# Altium PCB rotenc.PcbDoc
Units mil, origin at the board's own origin, x right, y up, seen from the top; angles counter-clockwise.
Board outline 1404 x 1404 mil, 2 copper layers (Top Layer, Bottom Layer); 22 components, 18 nets, 74 pads, 20 vias.
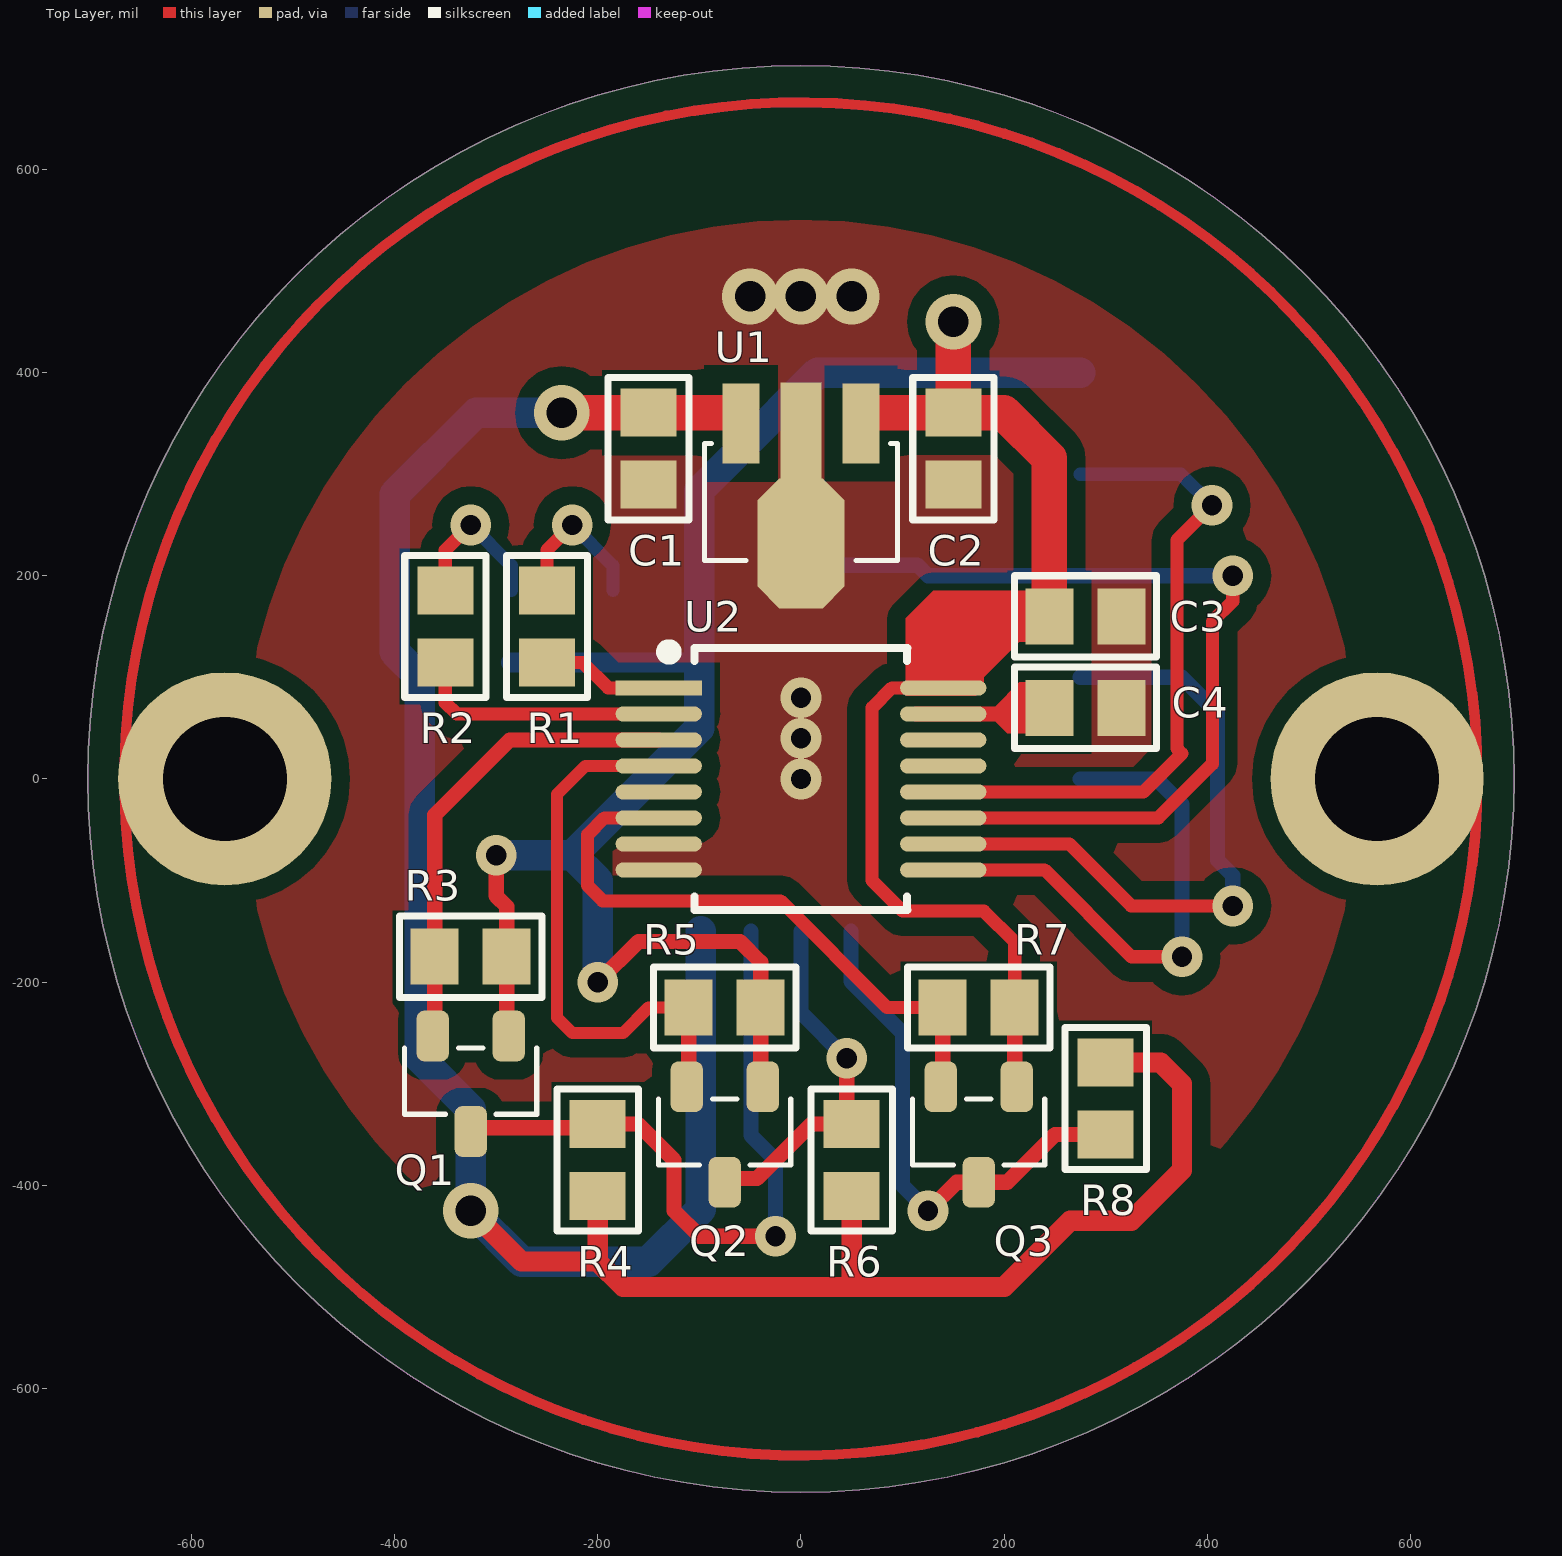
[diagram p0: Top Layer view]
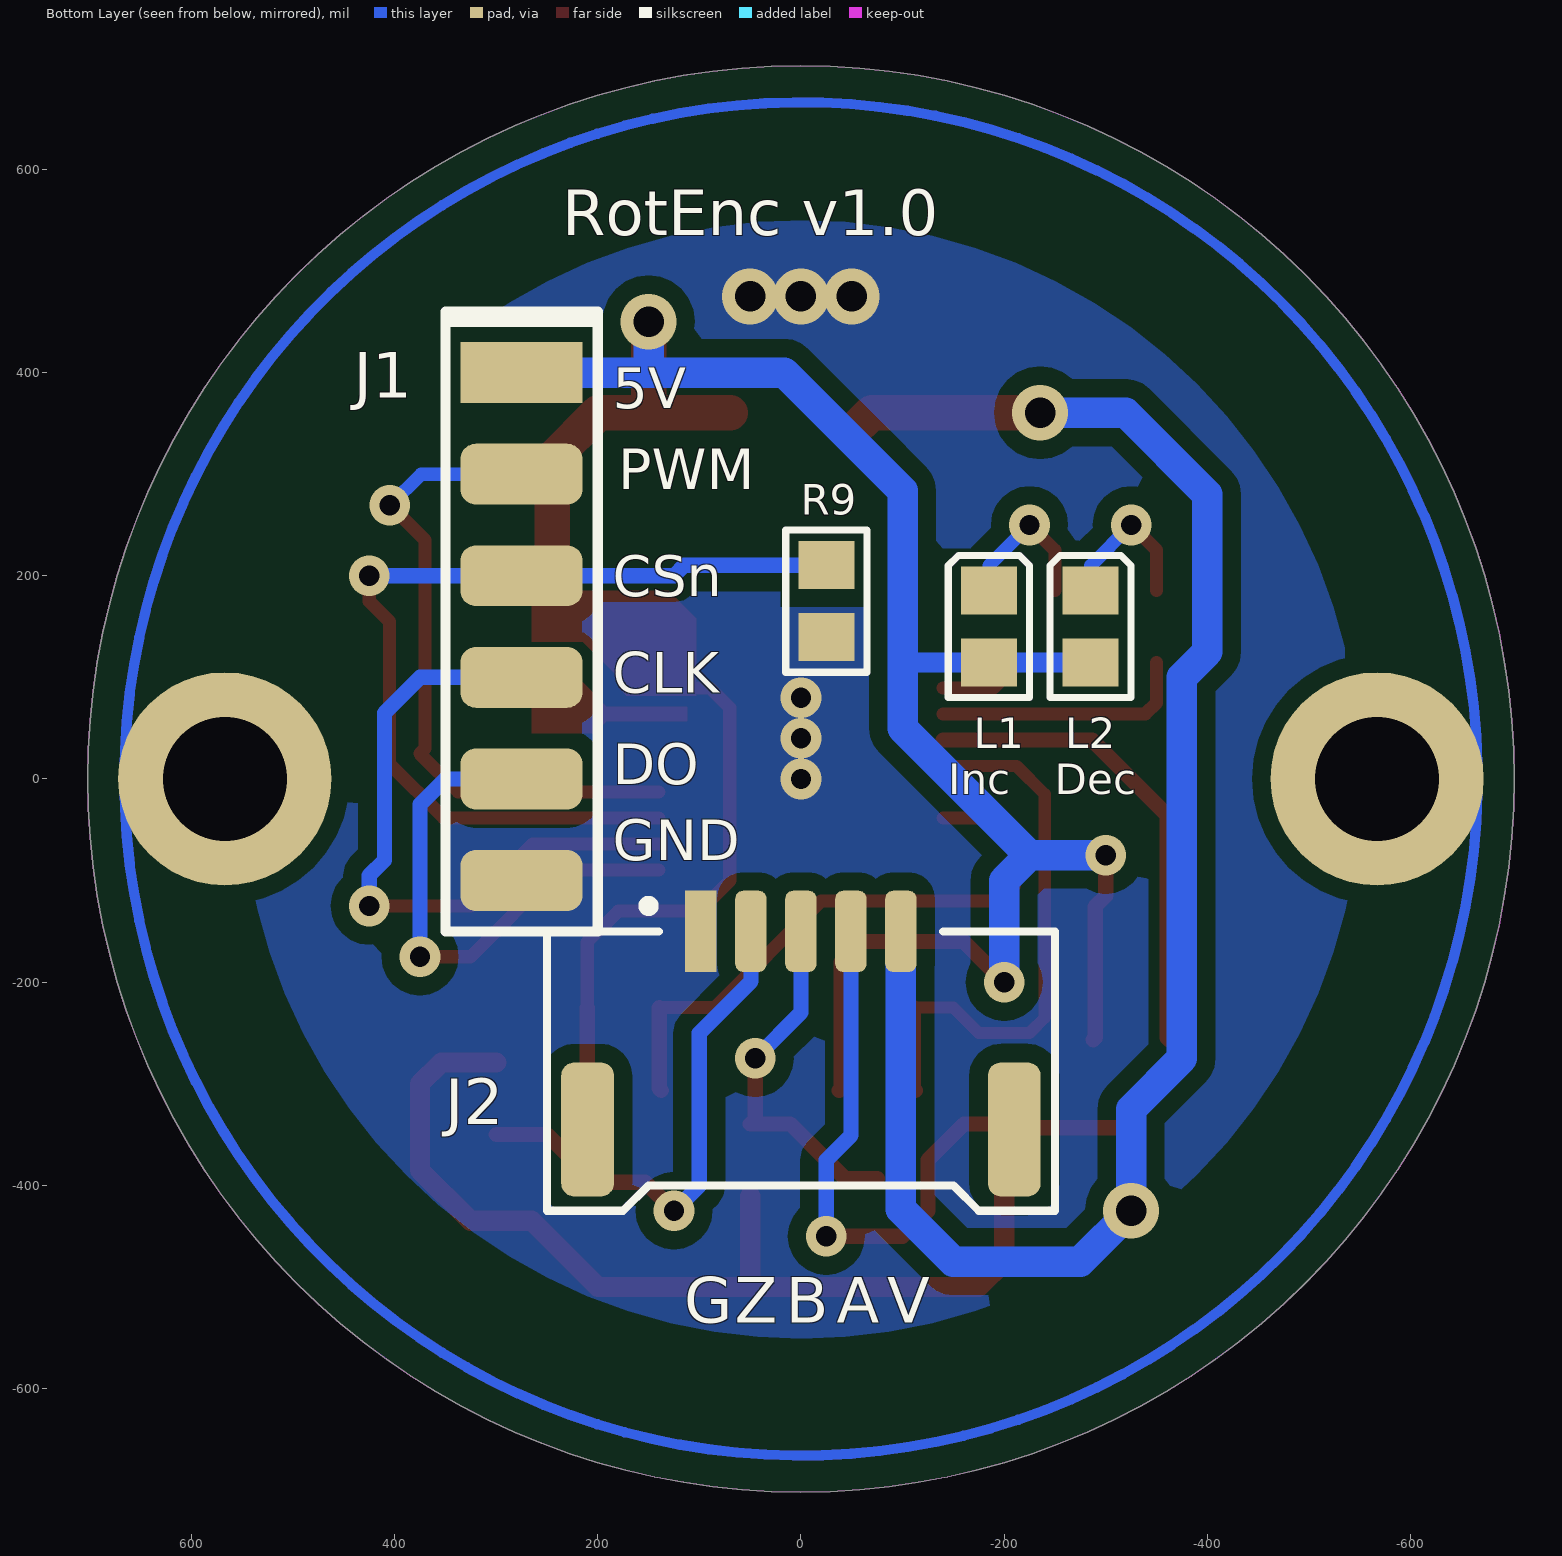
[diagram p1: Bottom Layer view, seen from below]
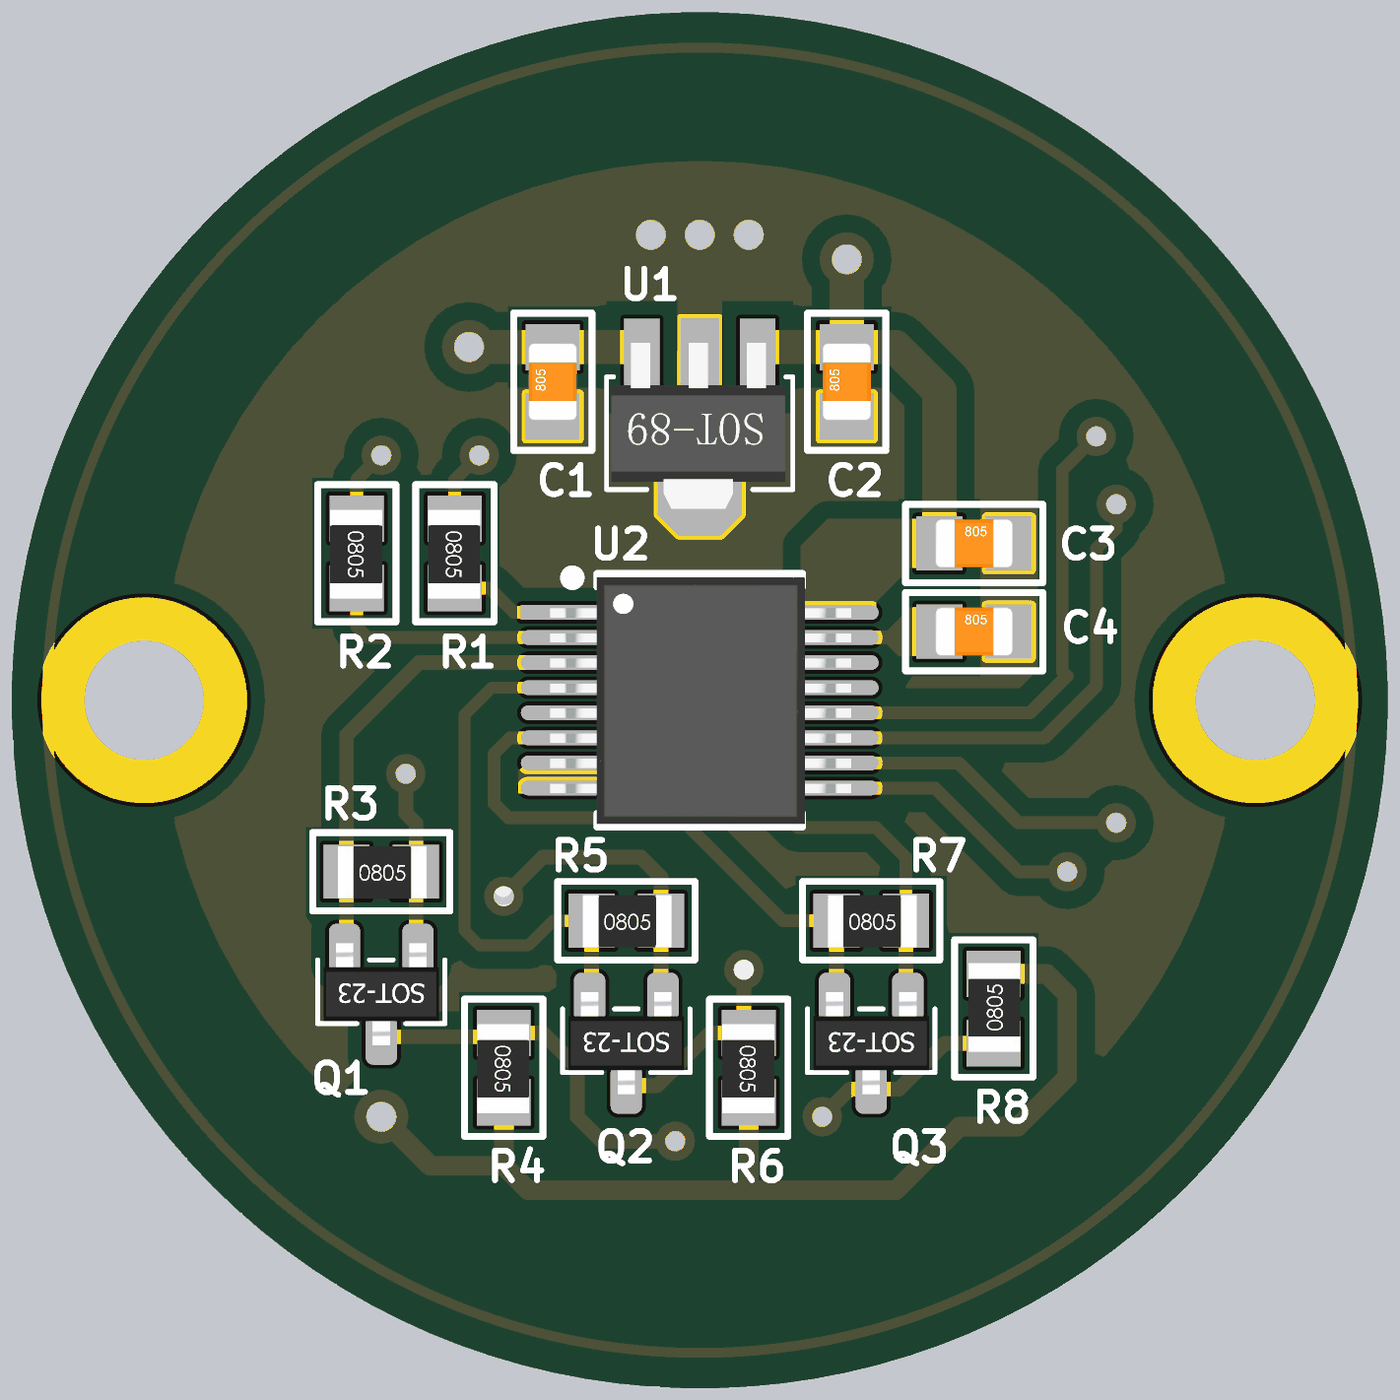
[diagram p2: 3D render of the assembled board from above, using the file's embedded part models]
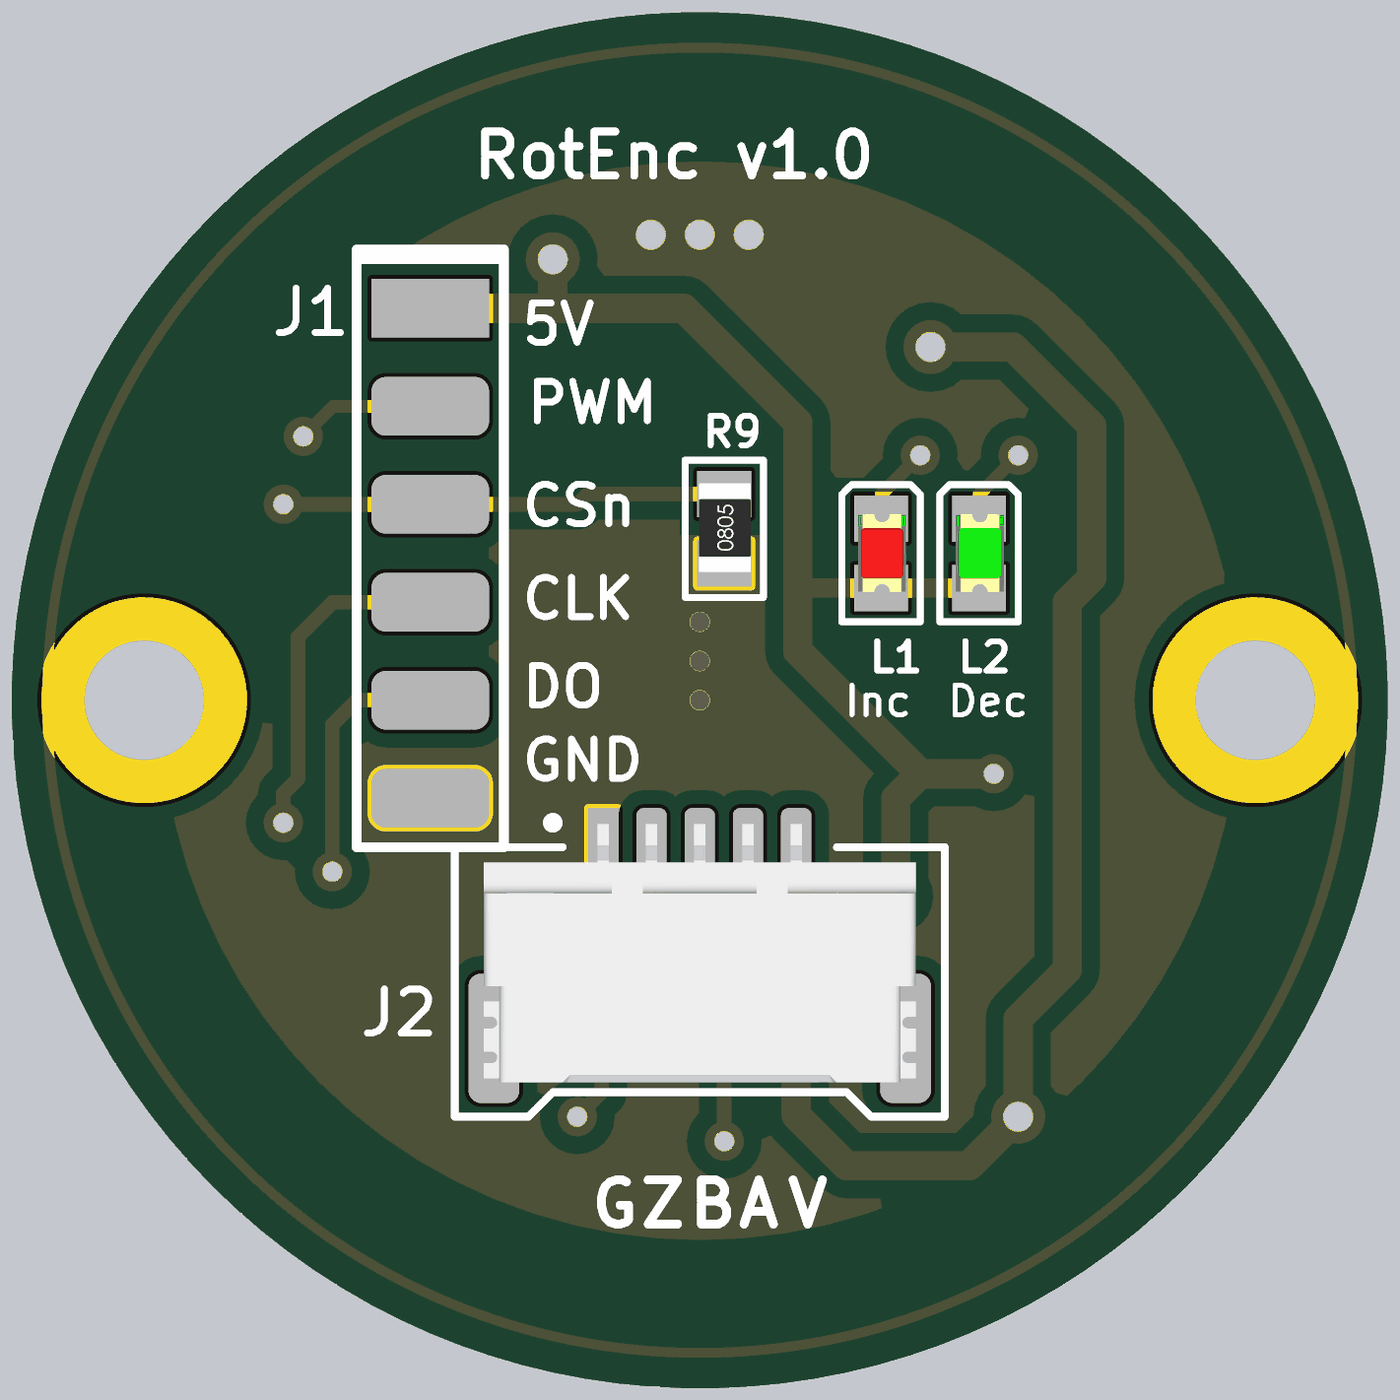
[diagram p3: 3D render of the assembled board from below, using the file's embedded part models]

## Layer stack, top to bottom
Top Solder: solder mask 0.4, Solder Resist, Dk 3.5
Top Layer: signal copper 1.4
Dielectric1: dielectric 12.6, FR-4, Dk 4.8
Bottom Layer: signal copper 1.4
Bottom Solder: solder mask 0.4, Solder Resist, Dk 3.5

## Board outline
0,-702 cw(c0,0) -702,0 cw(c0,0) 0,702 cw(c0,0) 702,0 cw(c0,0)

## Design rules (kind name [scope] priority, off if disabled: settings)
Clearance Clearance_1 [InPolygon] p1: gap=18
Clearance [All] p2: gap=10
HoleSize [All] p1: absolutevalues=TRUE maxlimit=200 minlimit=1 maxpercent=80.000 minpercent=20.000
MinimumSolderMaskSliver [All] p1: minsoldermaskwidth=2
PolygonConnect [All] p1: connectstyle=Direct reliefconductorwidth=10 reliefentries=4 polygonreliefangle="90 Angle" airgapwidth=10
RoomDefinition rotenc [InComponentClass('rotenc')] p1: confinementstyle=ConfineOut formatcopy=TRUE lockcomponents=FALSE outline 900,-750 1400,-750 1400,-250 900,-250
RoutingVias [All] p1: holewidth=25 width=45 viastyle="Through Hole" minholewidth=15 minwidth=20 maxholewidth=180 maxwidth=200
SilkToSilkClearance [All] p1: silktosilkclearance=5
SilkToSolderMaskClearance [IsPad] p1: minsilkscreentomaskgap=3 clearancetoexposedcopper=TRUE
SolderMaskExpansion [All] p1: expansion=4
Width [All] p1: maxlimit=90 minlimit=5 preferedwidth=12 minimp=50.000000 maximp=50.000000 favimp=50.000000
26 further rules are at their usual default settings.

## Components (designator, comment, footprint, x,y, rotation, side; value= is the part's Value field where it differs from the comment)
C1 "0.1uF" CAP0805 -150,325 r90 top
C2 "0.1uF" CAP0805 150,325 r90 top
C3 "0.1uF" CAP0805 280,160 r0 top
C4 "10uF" CAP0805 280,70 r0 top
J1 "Header 6" J6 275,150 r270 bottom
J2 "Header 5" A1254_5P 0,-150 r0 bottom
L1 "Red" LED2R -185,150 r90 bottom
L2 "Green" LED2G -285,150 r90 bottom
Q1 "2N7002" SOT23_NMOS -325,-300 r180 top
Q2 "2N7002" SOT23_NMOS -75,-350 r180 top
Q3 "2N7002" SOT23_NMOS 175,-350 r180 top
R1 "Resistor" RES0805 -250,150 r270 top
R2 "Resistor" RES0805 -350,150 r270 top
R3 "Resistor" RES0805 -325,-175 r0 top
R4 "Resistor" RES0805 -200,-375 r270 top
R5 "Resistor" RES0805 -75,-225 r0 top
R6 "Resistor" RES0805 50,-375 r270 top
R7 "Resistor" RES0805 175,-225 r0 top
R8 "Resistor" RES0805 300,-314.57 r90 top
R9 "Resistor" RES0805 -25,175 r90 bottom
U1 "78L05" SOT89_VREG 0,350 r180 top
U2 "AS5045B" SSOP16 0,0 r0 top locked

## Footprints (in the part's own frame and the unit in brackets; to place one, negate y for a bottom-side part, rotate by r counter-clockwise, add the part's x,y. Pads: shape width x height; smd on the part's side, far side on the other; paste and mask are expansions set on the pad)
A1254_5P [mil]
  rect 31x80 smd: 1(98.43,0)
  rrect50% 31x80 smd: 2(49.21,0) 3(0,0) 4(-49.21,0) 5(-98.43,0)
  rrect50% 52x132 smd: ""(-210,195) ""(210,195)
  silkscreen extent -250,-30 250,275, body extent -220,-24 220,240, height 117
CAP0805 [mm]
  rect 1.2x1.4 smd: 1(-0.9,0) 2(0.9,0)
  silkscreen extent -1.78,-1.02 1.78,1.02, body extent -1,-0.62 1,0.63, height 0.78
J6 [mil]
  rect 60x120 smd: 1(-250,0)
  rrect50% 60x120 smd: 2(-150,0) 3(-50,0) 4(50,0) 5(150,0) 6(250,0)
  silkscreen extent -310,-75 300,75
LED2G [mm]
  rect 1.2x1.4 smd: 1(-0.9,0) 2(0.9,0)
  silkscreen extent -1.78,-1.02 1.78,1.02, body extent -1.01,-0.65 1.01,0.6, height 1.1
LED2R [mm]
  rect 1.2x1.4 smd: 1(-0.9,0) 2(0.9,0)
  silkscreen extent -1.78,-1.02 1.78,1.02, body extent -1.01,-0.65 1.01,0.6, height 1.1
RES0805 [mm]
  rect 1.2x1.4 smd: 1(-0.9,0) 2(0.9,0)
  silkscreen extent -1.78,-1.02 1.78,1.02, body extent -1.12,-0.69 1.18,0.66, height 0.76
SOT23_NMOS [mil]
  rrect50% 32x50 smd: D(0,47) G(-37.4,-47) S(37.4,-47)
  silkscreen extent -65,-35 65,30, body extent -59,-52 59,52, height 43
SOT89_VREG [mm]
  rect 0.92x2 smd: 1(-1.5,0) 3(1.5,0)
  oct 2.184x3.251 smd: 2(0,3)
  rect 1.016x2.54 smd: 2(0,0.254)
  silkscreen extent -2.41,0.51 2.41,3.43, body extent -2.21,-0.37 2.29,3.93, height 1.51
SSOP16 [mil]
  rect 85x15 smd: 1(-140,89.57)
  oval 85x15 smd: 2(-140,63.98) 3(-140,38.39) 4(-140,12.8) 5(-140,-12.8) 6(-140,-38.39) 7(-140,-63.98) 8(-140,-89.57) 9(140,-89.57) 10(140,-63.98) 11(140,-38.39) 12(140,-12.8) 13(140,12.8) 14(140,38.39) 15(140,63.98) 16(140,89.57)
  silkscreen extent -135,-129 105,130, body extent -153,-126 155,126, height 85

## Part data
C1 C2 C3 C4: library part Cap, "0805电容"
J1: "选焊6P"
J2: "贴片接口5P"
L1: library part LED, "高亮红LED"
L2: library part LED, "高亮绿LED"
Q1 Q2 Q3: library part NMOS, "贴片MOS管"
R1 R2 R3 R4 R5 R6 R7 R8 R9: library part Res1, "0805电阻"
U1: "贴片稳压"
U2: "编码器IC"

## Free pads (board coordinates)
  round 210 hole 122: 0(-567,0) 0(567,0)

## Via types
v1: diameter 40, hole 20, Top Layer to Bottom Layer, tented both sides, 14 vias
v2: diameter 55, hole 30, Top Layer to Bottom Layer, tented both sides, 6 vias

## Nets (pads, with @x,y where several pads share a name; then routed paths per layer and width w, separated by ;. In a path a pad name is that pad's centre, name@x,y a point inside that pad or via, vN(x,y) a via of type N, cw(c..) or ccw(c..) an arc to the next point about the centre after c; other vN are vias at no path point)
5V: C2.2 C3.1 J1.1 L1.1 L2.1 Q1.G Q2.G Q3.G R3.2 R5.2 R7.2 U1.1 U2.16 | length 2772.9
  Top Layer w13: U2.16 89.57,89.57 70,70 70,-100 100,-130 180,-130 210.43,-160.43 R7.2
  Top Layer w15: v1@-300,-80 -300,-115 -289.57,-125.43 R3.2 -289.57,-254.72 Q1.G@-287.6,-256.69 ; v1(-200,-200) -160,-160 -60,-160 -39.57,-180.43 R5.2 -39.57,-304.72 Q2.G@-37.6,-306.69 ; R7.2 210.43,-304.72 Q3.G@212.4,-306.69
  Top Layer w35: U1.1@69.49,360.43 C2.2 ; v2(150,450) C2.2 ; C3.1 244.57,315.43 199.57,360.43 C2.2
  Bottom Layer w15: -100.43,114.57 -100,115
  Bottom Layer w20: L2.1 L1.1 -100.43,114.57
  Bottom Layer w30: v1(-300,-75) -225,-75 ; v1(-200,-200) -200,-100 -225,-75 ; -59.66,323.97 -100,283.63 -100,115 -100,50 -225,-75 ; -59.64,324 16.36,400 150,400 ; v2(150,450) 150,400 ; J1.1 150,400
CLK: J1.4 U2.10 | length 656
  Top Layer w13: U2.10 263.98,-63.98 325,-125 v1(425,-125)
  Bottom Layer w15: J1.4 375,100 410,65 410,-80 425,-95 v1(425,-125)
CSN: J1.3 R9.2 U2.11 | length 934.7
  Top Layer w13: U2.11 351.61,-38.39 405,15 405,155 425,175 v1(425,200)
  Bottom Layer w15: R9.2 114.57,210.43 125,200 J1.3 v1(425,200)
DEC: R2.2 U2.2 | length 254.1
  Top Layer w13: R2.2 -350,75 -338.98,63.98 U2.2
DO: J1.5 U2.9 | length 530.7
  Top Layer w13: U2.9 239.78,-89.57 325.22,-175 v1(375,-175)
  Bottom Layer w15: J1.5 350,0 375,-25 v1(375,-175)
GND: C1.1 C2.1 C3.2 C4.2 J1.6 J2.1 R9.1 U1.2 U2.7 U2.8
  other v1: 0,0 0,40 0,80
  other v2: -50,475 0,475 50,475
INC: R1.2 U2.1 | length 120.4
  Top Layer w13: R1.2 -214.57,114.57 -189.57,89.57 U2.1
NET_A: J2.4 Q1.D R4.1 | length 686.6
  Top Layer w15: Q1.D@-325,-343.31 -203.74,-343.31 R4.1 -160.43,-339.57 -125,-375 -125,-425 -100,-450 v1(-25,-450)
  Bottom Layer w15: J2.4 -49.21,-350.79 -25,-375 v1(-25,-450)
NET_B: J2.3 Q2.D R6.1 | length 350.5
  Top Layer w15: Q2.D@-75,-393.31 -43.31,-393.31 10.43,-339.57 R6.1 ; R6.1@45,-334.57 v1(45,-275)
  Bottom Layer w15: J2.3 0,-230 v1(45,-275)
NET_Z: J2.2 Q3.D R8.1 | length 512.5
  Top Layer w15: v1(125,-425) 153,-397 Q3.D 203,-397 250,-350 R8.1
  Bottom Layer w15: J2.2 49.21,-199.21 100,-250 100,-400 v1(125,-425)
NetC4_1: C4.1 U2.15
NetL1_2: L1.2 R1.1 | length 156.1
  Top Layer w13: R1.1 -250,225 v1(-225,250)
  Bottom Layer w13: v1(-225,250) -185,210 L1.2
NetL2_2: L2.2 R2.1 | length 156.1
  Top Layer w13: R2.1 -350,225 v1(-325,250)
  Bottom Layer w13: v1(-325,250) -285,210 L2.2
OUT_A: Q1.S R3.1 U2.3 | length 473.1
  Top Layer w15: Q1.S@-362.4,-256.69 -360.43,-254.72 R3.1 -360.43,-35.43 -286.61,38.39 U2.3
OUT_B: Q2.S R5.1 U2.4 | length 560.2
  Top Layer w12: U2.4 -212.2,12.8 -240,-15 -240,-235 -225,-250 -175,-250 -150,-225 R5.1
  Top Layer w15: Q2.S@-112.4,-306.69 -110.43,-304.72 R5.1
OUT_Z: Q3.S R7.1 U2.6 | length 608.7
  Top Layer w13: U2.6 -193.39,-38.39 -210,-55 -210,-105 -195,-120 -20,-120 85,-225 R7.1
  Top Layer w15: Q3.S@137.6,-306.69 139.57,-304.72 R7.1
PWM: J1.2 U2.12 | length 653.5
  Top Layer w13: U2.12 337.2,-12.8 375,25 370,30 370,235 v1@404.27,269.27
  Bottom Layer w13: J1.2 373.85,300 v1(404.59,269.27)
VIN: C1.2 J2.5 R4.2 R6.2 R8.2 U1.3 | length 2758.2
  Top Layer w20: v2(-325,-425) -275,-475 -200,-475 ; R4.2 -200,-475 ; R6.2 50,-500 ; R8.2 354.13,-279.13 375,-300 375,-385 325,-435 265,-435 200,-500 50,-500 ; -200,-475 -175,-500 50,-500
  Top Layer w35: v2(-235.43,360.43) C1.2 -69.49,360.43 U1.3
  Bottom Layer w30: v2(-235.43,360.43) -319.57,360.43 -400,280 -400,125 -375,100 -375,-275 -325,-325 v2(-325,-425) -275,-475 -150,-475 -98.43,-423.43 J2.5
pads on no net: J2. U2.5 U2.13 U2.14
copper on no net: | length 8369.2
  Top Layer w10: 666,0 ccw(c0,0) 666,0
  Bottom Layer w10: 666,0 ccw(c0,0) 666,0

## Polygon pours and split planes (outlines as drawn)
GND on Top Layer "Bottom Layer-No Net" (solid, remove dead copper, pour order 8): -0.02,-550 cw(c-0.02,0) -550.02,0 cw(c-0.02,0) -0.02,550 cw(c-0.02,0) 549.98,0 cw(c-0.02,0)
GND on Bottom Layer "Bottom Layer-No Net" (solid, remove dead copper, pour order 6): -0.54,-550.46 cw(c-0.54,-0.46) -550.54,-0.46 cw(c-0.54,-0.46) -0.54,549.54 cw(c-0.54,-0.46) 549.46,-0.46 cw(c-0.54,-0.46)

## Keep-outs
Keep-Out Layer:
  circle w1: c0,0 r702

## Other copper
Top Layer:
  region net 5V: 265,185 130,185 103,158 103,82 172,82 180,90 180,100 215,135 265,135
  region net NetC4_1: 265,95 215,95 191,71 112,71 112,57 191,57 203,45 265,45

## Silkscreen, mask and mechanical layers (free items; w line width, h text height)
Bottom Overlay:
  text "RotEnc v1.0" at 235,535 h45
  text "5V" at 185,365 h40
  text "PWM" at 180,285 h40
  text "CSn" at 185,180 h40
  text "CLK" at 185,85 h40
  text "DO" at 185,-5 h40
  text "Dec" at -250,-15 h30
  text "Inc" at -145,-15 h30
  text "GND" at 185,-80 h40
  text "V" at -85,-535 h45
  text "A" at -35,-535 h45
  text "B" at 15,-535 h45
  text "Z" at 65,-535 h45
  text "G" at 115,-535 h45